# Altium PCB Force_Sensor_Board.PcbDoc
Units mil, origin at the board's own origin, x right, y up, seen from the top; angles counter-clockwise.
Board outline 2900 x 3250 mil, 2 copper layers (Top Layer, Bottom Layer); 66 components, 44 nets, 301 pads, 125 vias.
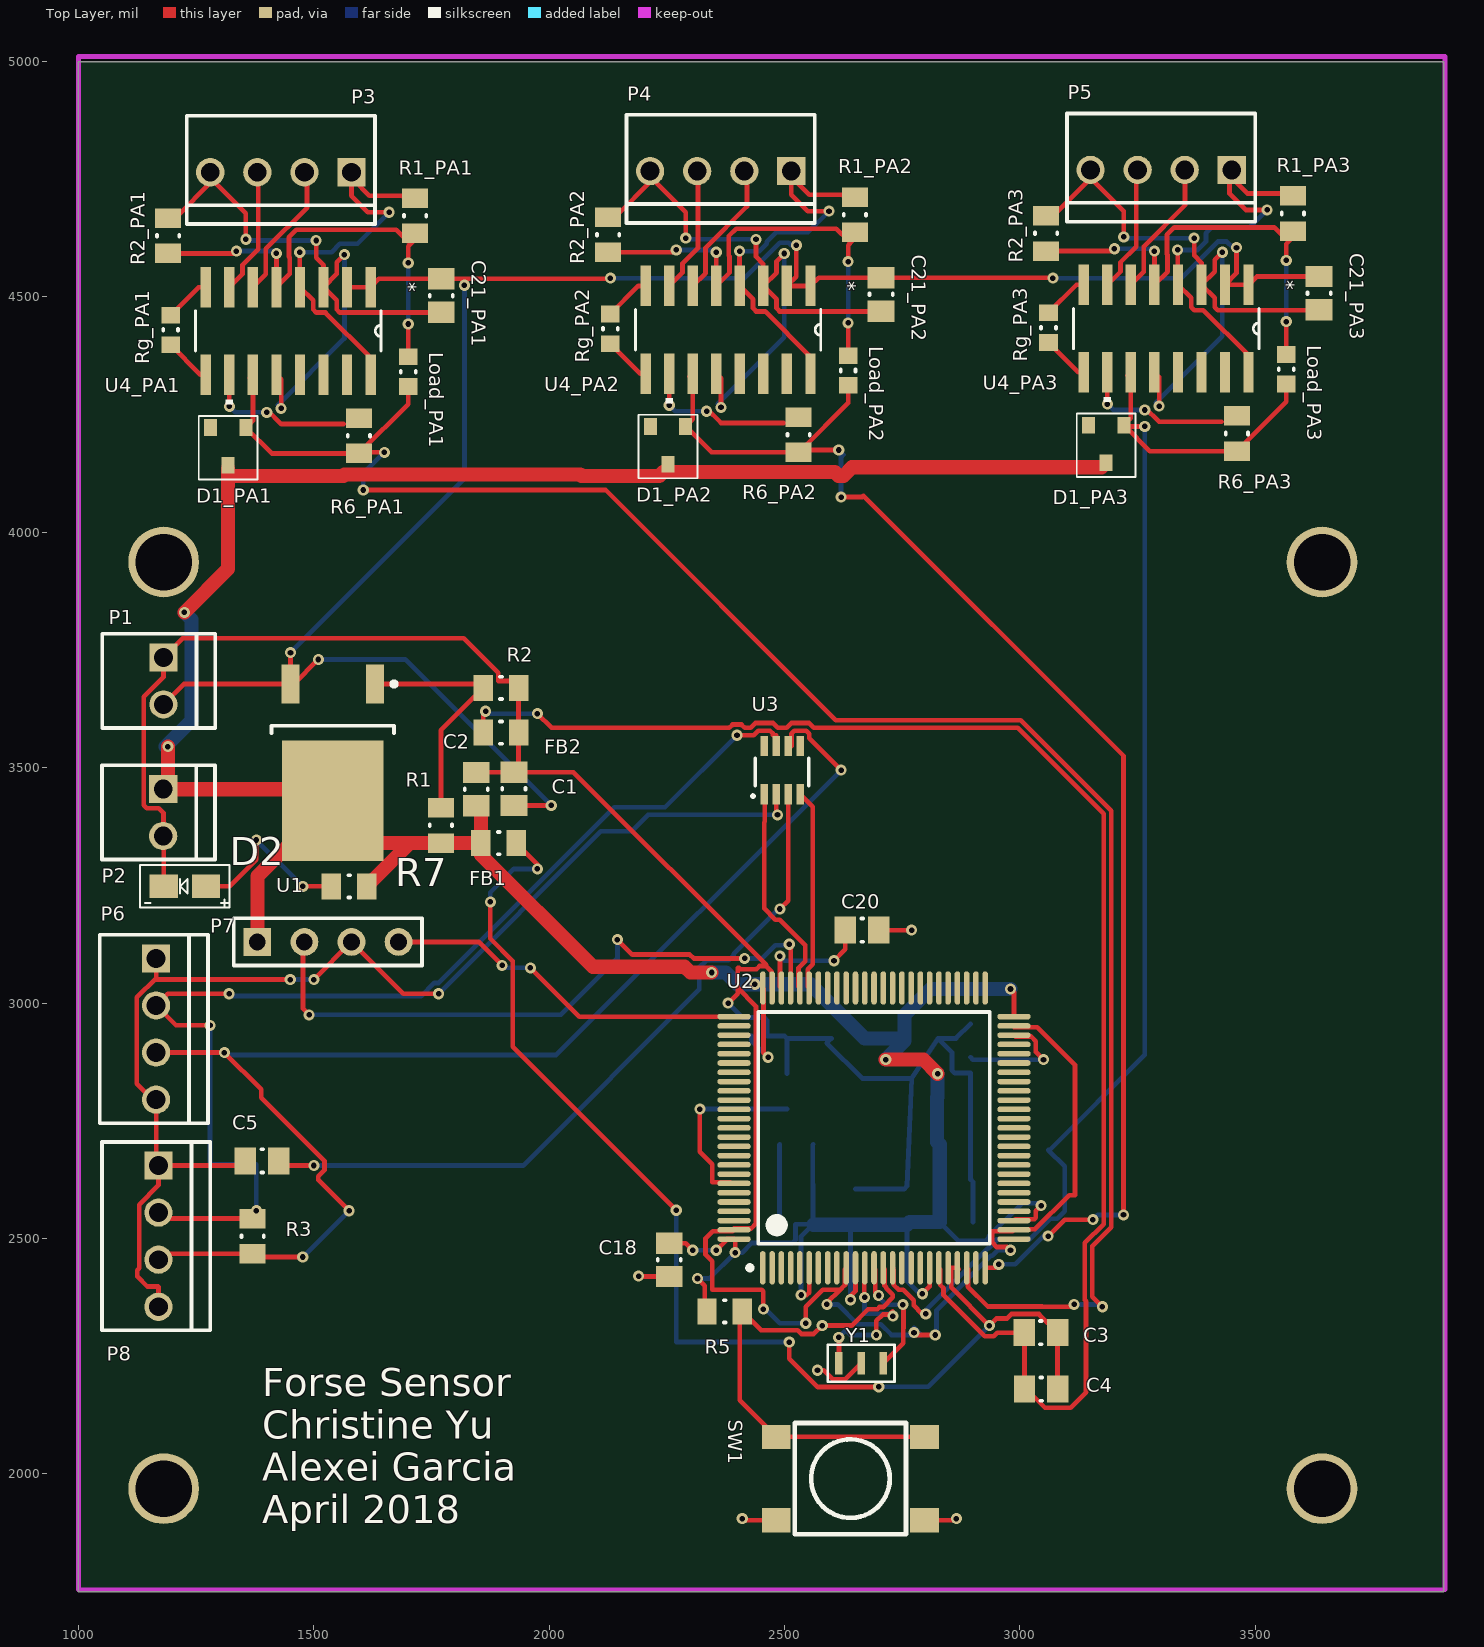
[diagram p0: Top Layer view]
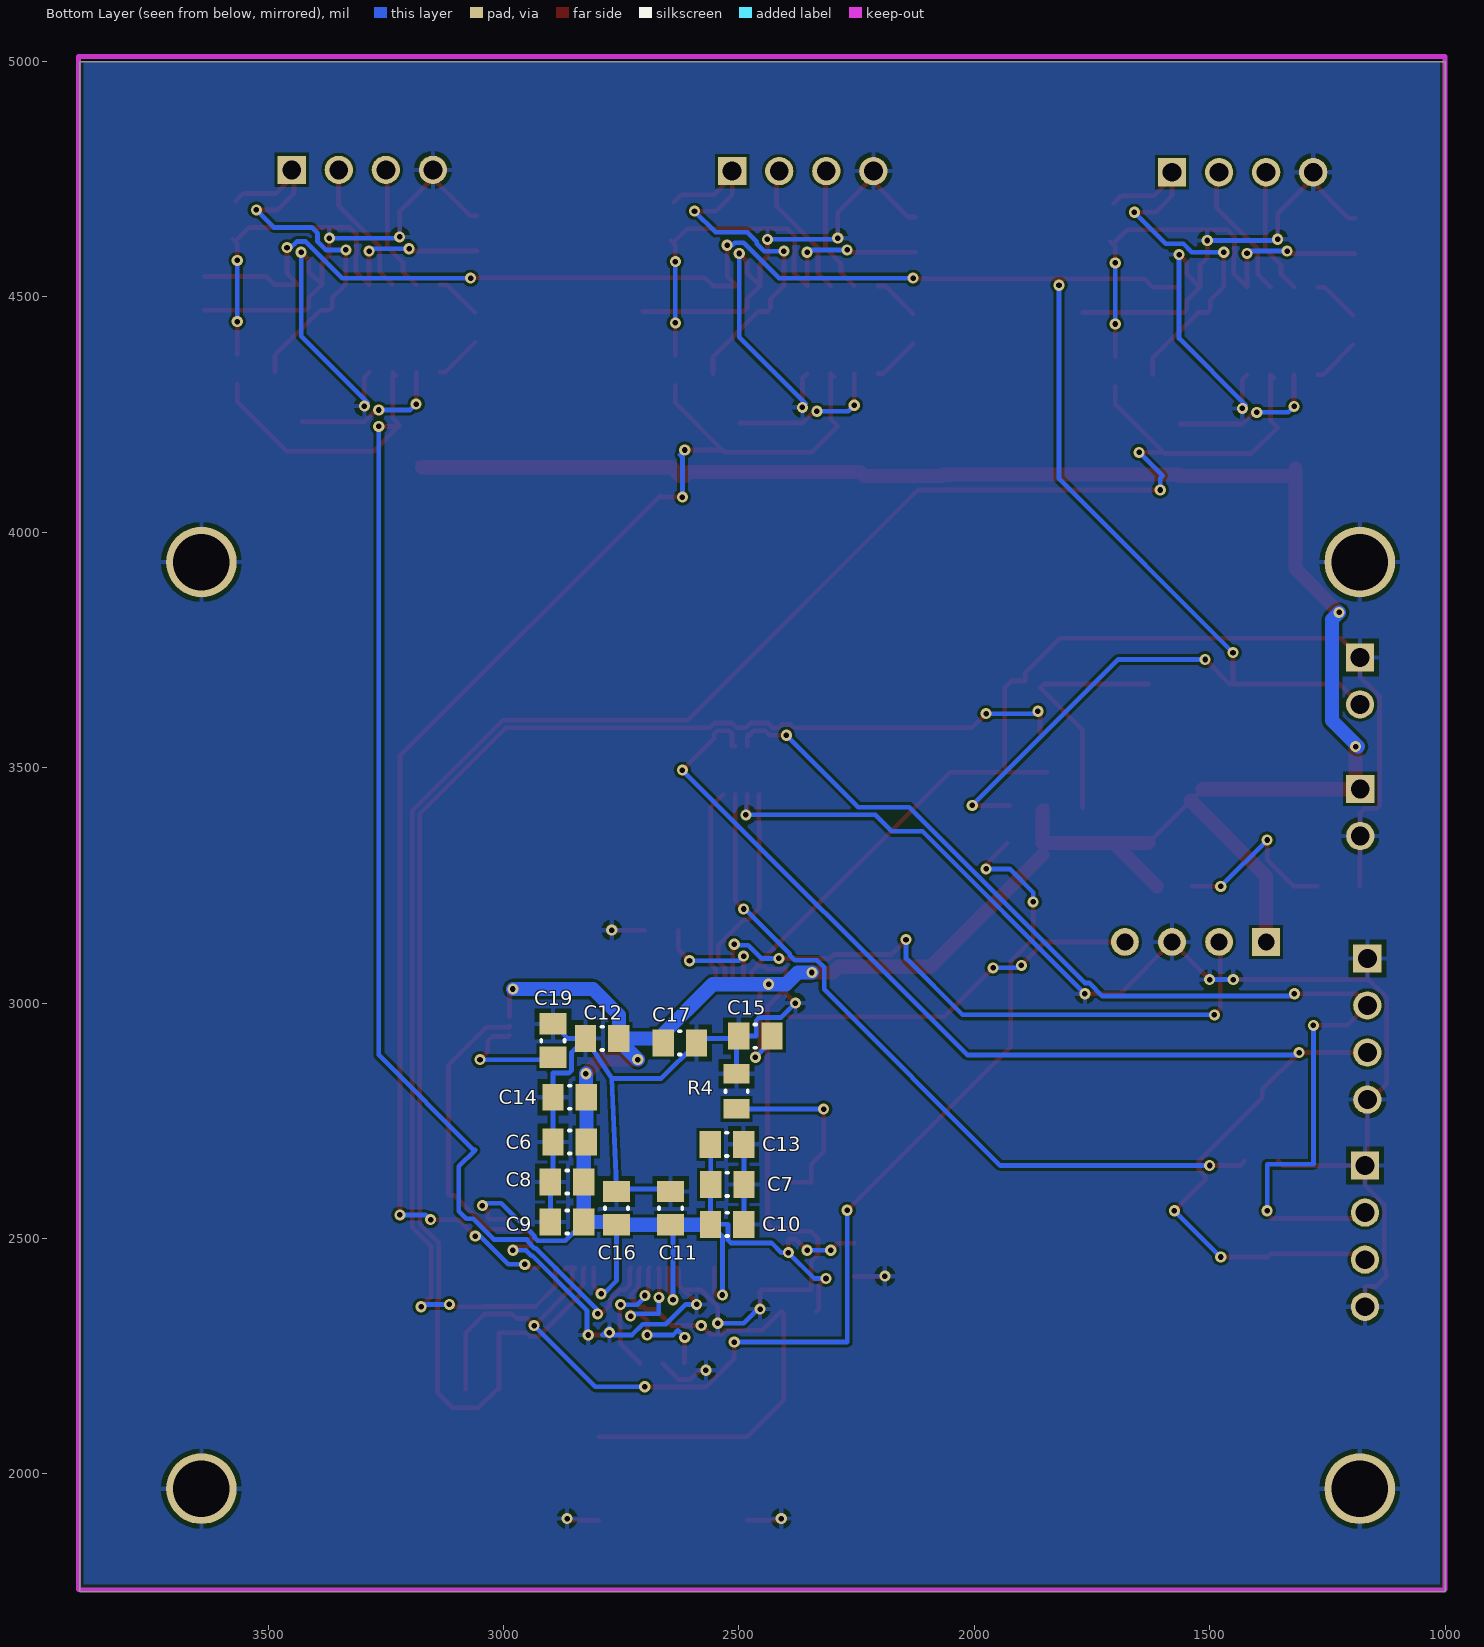
[diagram p1: Bottom Layer view, seen from below]
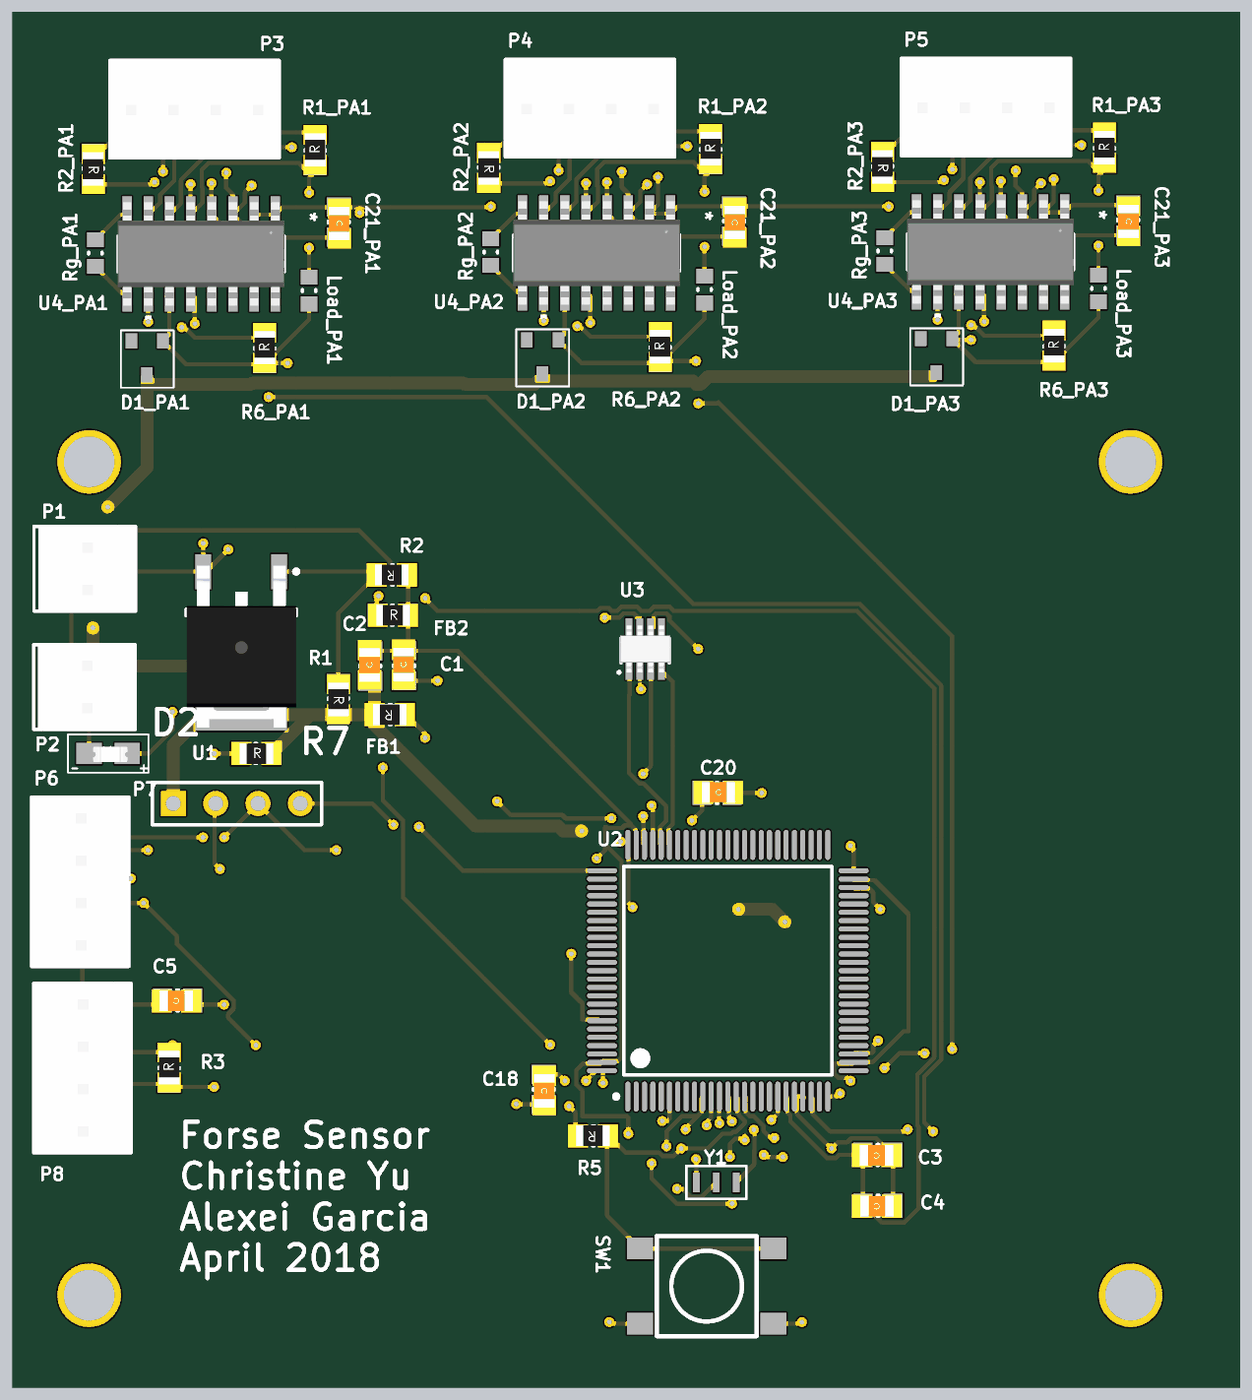
[diagram p2: 3D render of the assembled board from above, using the file's embedded part models]
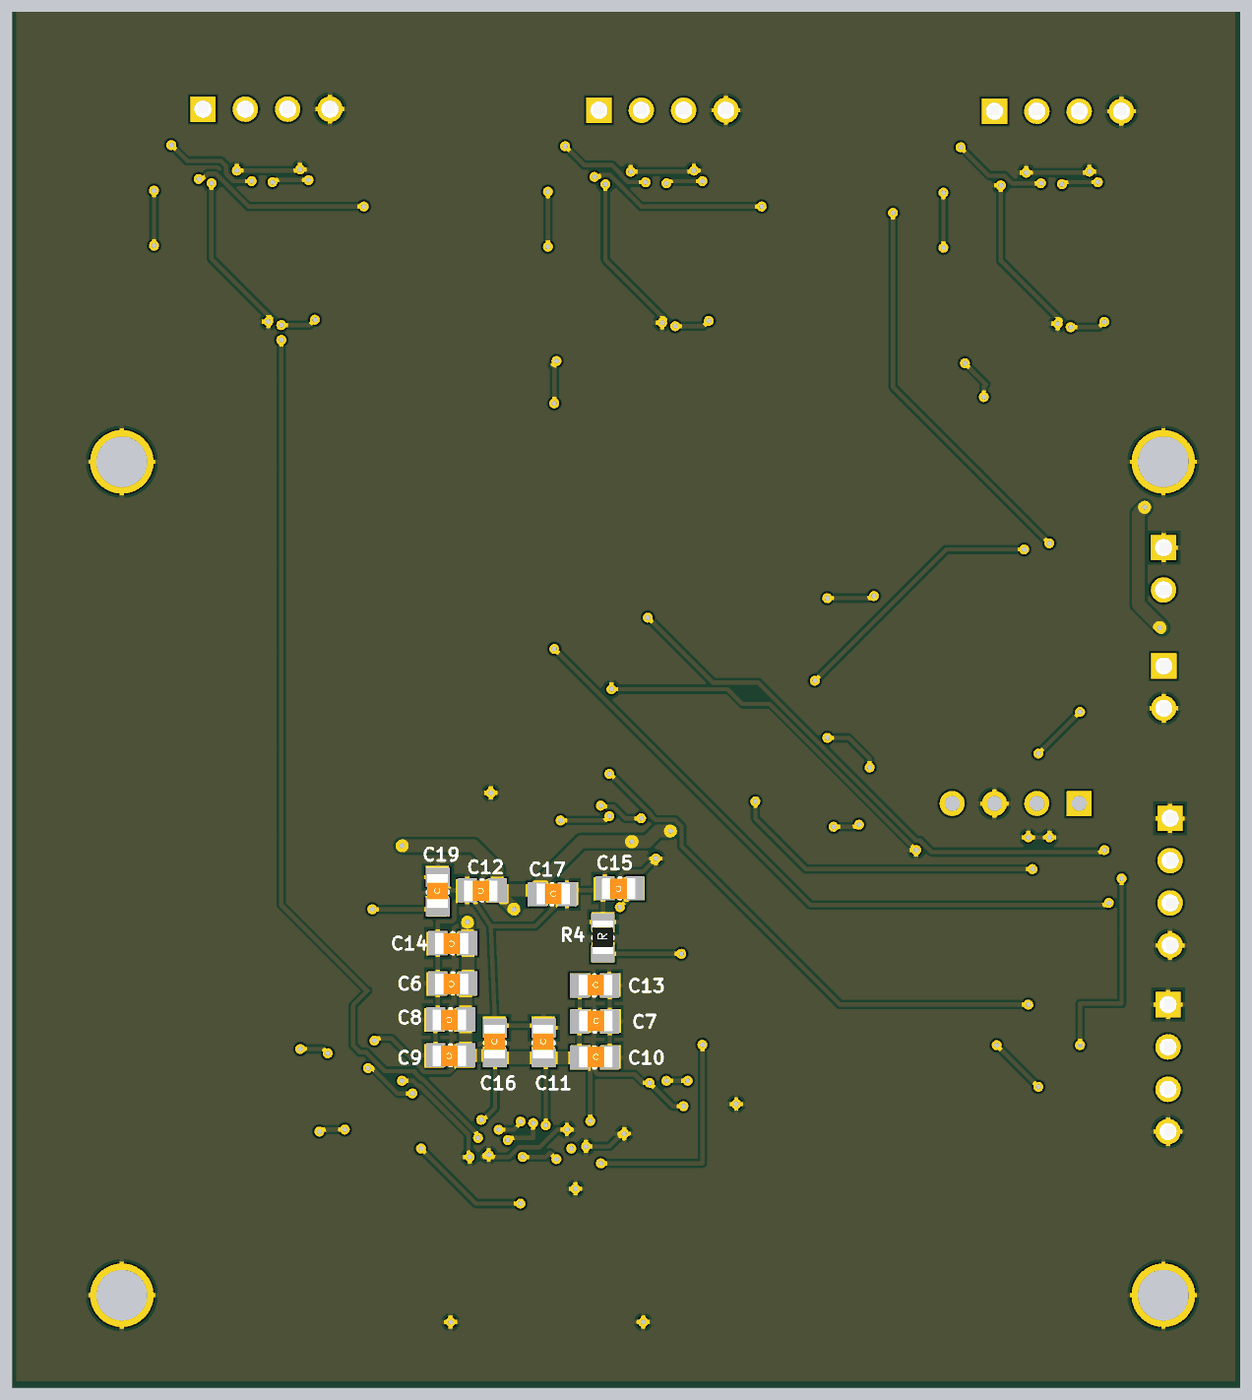
[diagram p3: 3D render of the assembled board from below, using the file's embedded part models]

## Layer stack, top to bottom
Top Solder: solder mask 0.4, Solder Resist, Dk 3.5
Top Layer: signal copper 1.4
Dielectric 1: dielectric 12.6, FR-4, Dk 4.8
Bottom Layer: signal copper 1.4
Bottom Solder: solder mask 0.4, Solder Resist, Dk 3.5

## Board outline
1000,1750 3900,1750 3900,5000 1000,5000

## Design rules (kind name [scope] priority, off if disabled: settings)
Clearance [All] p1: gap=6 ignorepadtopadclearanceinfootprint=FALSE
HoleSize [All] p1: absolutevalues=TRUE maxlimit=250 minlimit=1 maxpercent=80.000 minpercent=20.000
MinimumSolderMaskSliver [All] p1: minsoldermaskwidth=0
PolygonConnect [All] p1: connectstyle=Relief reliefconductorwidth=10 reliefentries=4 polygonreliefangle="90 Angle" airgapwidth=10
RoomDefinition PA3 [InComponentClass('PA3')] p1: confinementstyle=ConfineIn formatcopy=TRUE lockcomponents=FALSE outline 2900,4975 2900,4000 3795,4000 3795,4975
RoomDefinition PA2 [InComponentClass('PA2')] p2: confinementstyle=ConfineIn formatcopy=TRUE lockcomponents=FALSE outline 1969.37,4972.4 1969.37,3997.4 2864.37,3997.4 2864.37,4972.4
RoomDefinition PA1 [InComponentClass('PA1')] p3: confinementstyle=ConfineIn formatcopy=TRUE lockcomponents=FALSE outline 1035,4970 1035,3995 1930,3995 1930,4970
RoomDefinition U_Power [InComponentClass('U_Power')] p4: confinementstyle=ConfineIn formatcopy=TRUE lockcomponents=FALSE outline 1040.2,3200 2120,3200 2120,3869.8 1040.2,3869.8
RoutingVias [All] p1: holewidth=11.81 width=23.62 viastyle="Through Hole" minholewidth=11.81 minwidth=23.62 maxholewidth=11.81 maxwidth=23.62
SilkToSilkClearance [All] p1: silktosilkclearance=0
SilkToSolderMaskClearance [IsPad] p1: minsilkscreentomaskgap=0 clearancetoexposedcopper=TRUE
SolderMaskExpansion [All] p1: expansion=4
Width [All] p1: maxlimit=100 minlimit=6 preferedwidth=10
26 further rules are at their usual default settings.

## Classes and differential pairs
channel class power_amp_module: PA1 PA2 PA3
component class U_Power: C1 C2 D2 FB1 FB2 P1 P2 R1 R2 R7 U1
component class PA3: C21_PA3 D1_PA3 Load_PA3 R1_PA3 R2_PA3 R6_PA3 Rg_PA3 U4_PA3
component class PA2: C21_PA2 D1_PA2 Load_PA2 R1_PA2 R2_PA2 R6_PA2 Rg_PA2 U4_PA2
component class PA1: C21_PA1 D1_PA1 Load_PA1 R1_PA1 R2_PA1 R6_PA1 Rg_PA1 U4_PA1
component class micro_schematic: C3 C4 C5 C6 C7 C8 C9 C10 C11 C12 C13 C14 C15 C16 C17 C18 C19 C20 P3 P4 P5 P6 P7 P8 R3 R4 R5 SW1 U2 U3 Y1

## Components (designator, comment, footprint, x,y, rotation, side; value= is the part's Value field where it differs from the comment)
C1 "0.1uF" C0805 1925,3455.24 r90 top
C2 "1uF" C0805 1845,3454.37 r90 top
C3 "100n" C0805 3044.57,2300 r180 top
C4 "1u" C0805 3045,2180 r180 top
C5 "0.1uF" C0805 1390,2665 r180 top
C6 "100n" C0805 2859.57,2705 r0 bottom
C7 "100n" C0805 2524.57,2615 r180 bottom
C8 "100n" C0805 2865,2620 r0 bottom
C9 "100n" C0805 2865,2535 r0 bottom
C10 "4u7" C0805 2525,2530 r180 bottom
C11 "100n" C0805 2645,2564.57 r90 bottom
C12 "100n" C0805 2790.43,2925 r0 bottom
C13 "100n" C0805 2525.43,2700 r180 bottom
C14 "100n" C0805 2859.57,2800 r0 bottom
C15 "100n" C0805 2465,2930 r0 bottom
C16 "100n" C0805 2760,2564.57 r90 bottom
C17 "100n" C0805 2625.43,2915.43 r180 bottom
C18 "100n" C0805 2255,2454.57 r270 top
C19 "*" C0805 2895,2920.43 r90 bottom
C20 "*" C0805 2664.57,3155 r0 top
C21_PA1 "0.1uF" C0805 1770.63,4503.03 r270 top (schematic designator C21)
C21_PA2 "0.1uF" C0805 2705,4505.43 r270 top (schematic designator C21)
C21_PA3 "0.1uF" C0805 3635.63,4508.03 r270 top (schematic designator C21)
D1_PA1 "BAT54-SOT23" SOT23-DIODE 1355.63,4222.6 r270 top (schematic designator D1)
D1_PA2 "BAT54-SOT23" SOT23-DIODE 2290,4225 r270 top (schematic designator D1)
D1_PA3 "BAT54-SOT23" SOT23-DIODE 3220.63,4227.6 r270 top (schematic designator D1)
D2 "LED" 0805LED 1271.1,3248.03 r180 top
FB1 "FERRITE" R0805 1892.4,3340 r180 top
FB2 "FERRITE" R0805 1897.6,3574.8 r0 top
Load_PA1 "" R0603 1700.63,4341.5 r270 top (schematic designator Load)
Load_PA2 "" R0603 2635,4343.9 r270 top (schematic designator Load)
Load_PA3 "" R0603 3565.63,4346.5 r270 top (schematic designator Load)
P1 "Molex KK 1x2" "Molex KK 2x1" 1180.59,3684.41 r0 top
P2 "Molex KK 1x2" "Molex KK 2x1" 1180,3405 r0 top
P3 "Molex KK 1x4" "Molex KK 4x1" 1380,4765 r270 top
P4 "Molex KK 1x4" "Molex KK 4x1" 2314.37,4767.4 r270 top
P5 "Molex KK 1x4" "Molex KK 4x1" 3250,4770 r270 top
P6 "Molex KK 1x4" "Molex KK 4x1" 1165,2895 r0 top
P7 "Header 4" HDR1X4 1380,3130 r0 top
P8 "Molex KK 1x4" "Molex KK 4x1" 1170,2455 r0 top
R1 "240R" R0805 1770,3377.4 r270 top
R1_PA1 "5.6k" R0805 1715,4672.4 r90 top (schematic designator R1)
R1_PA2 "5.6k" R0805 2649.37,4674.8 r90 top (schematic designator R1)
R1_PA3 "5.6k" R0805 3580,4677.4 r90 top (schematic designator R1)
R2 "390R" R0805 1897.6,3669.8 r180 top
R2_PA1 "1k" R0805 1190.63,4630 r270 top (schematic designator R2)
R2_PA2 "1k" R0805 2125,4632.4 r270 top (schematic designator R2)
R2_PA3 "1k" R0805 3055.63,4635 r270 top (schematic designator R2)
R3 "120R" R0805 1370,2505 r90 top
R4 "100R" R0805 2505,2812.6 r90 bottom
R5 "1k" R0805 2372.6,2345 r180 top
R6_PA1 "10k" R0805 1595.63,4205 r90 top (schematic designator R6)
R6_PA2 "10k" R0805 2530,4207.4 r90 top (schematic designator R6)
R6_PA3 "10k" R0805 3460.63,4210 r90 top (schematic designator R6)
R7 "2k" R0805 1574.8,3248.03 r0 top
Rg_PA1 "1k3" R0603 1195.63,4430 r270 top (schematic designator Rg)
Rg_PA2 "1k3" R0603 2130,4432.4 r270 top (schematic designator Rg)
Rg_PA3 "1k3" R0603 3060.63,4435 r270 top (schematic designator Rg)
SW1 "Push Switch" PUSHBUTTON 2640,1990 r0 top
U1 "LM317" D-PAK 1540.2,3510.51 r270 top
U2 "MC-ARM-STM32F446-LQFP100" STM-LQFP100_N 2690,2735 r90 top
U3 "TCAN332DCNT" SOT-23-8 2495,3495 r0 top
U4_PA1 "INA125_D_16" D16 1445.63,4428 r270 top value=Value (schematic designator U4)
U4_PA2 "INA125_D_16" D16 2380,4430.4 r270 top value=Value (schematic designator U4)
U4_PA3 "INA125_D_16" D16 3310.63,4433 r270 top value=Value (schematic designator U4)
Y1 "CSTCE8M00" "8MHz Ceramic Resonator" 2710,2235 r180 top

## Footprints (in the part's own frame and the unit in brackets; to place one, negate y for a bottom-side part, rotate by r counter-clockwise, add the part's x,y. Pads: shape width x height; smd on the part's side, far side on the other; paste and mask are expansions set on the pad)
"8MHz Ceramic Resonator" [mm] "8MHz Ceramic Resonator Murata"
  rect 0.4x1.2 smd: 1(0,0) 2(1.2,0) 3(2.4,0)
  silkscreen extent -0.6,-1 3,1
0805LED [mil]
  rect 60x50 smd: A(0,0) K(90,0)
  silkscreen extent -50,-45 140,45, body extent -1,-16 81,20, height 33
C0805 [mm] "Chip Capacitor, Body 2.0x1.2mm, Height 0.75mm, IPC Medium Density"
  rect 1.15x1.45 smd: 1(-0.9,0) 2(0.9,0)
  silkscreen extent -0.05,-0.62 0.05,0.63, body extent -1.42,-0.67 1.58,0.73, height 0.93
D16 [mil]
  rect 86x22 smd: 1(-93,175) 2(-93,125) 3(-93,75) 4(-93,25) 5(-93,-25) 6(-93,-75) 7(-93,-125) 8(-93,-175) 9(93,-175) 10(93,-125) 11(93,-75) 12(93,-25) 13(93,25) 14(93,75) 15(93,125) 16(93,175)
  silkscreen extent -43,-197 156,197, body extent -122,-197 122,197, height 69
D-PAK [mm] "D-PAK, 4-Leads, Body 6.1x6.5mm, Pitch 2.28mm, Lead Span 9.7mm, IPC Medium Density"
  rect 2.1x0.95 smd: 1(-4.25,2.28) 3(-4.25,-2.28)
  rect 6.5x5.5 smd: 4(2.05,0)
  silkscreen extent -4.37,-3.3 -1.6,3.43, body extent -4.6,-3.28 5.1,3.3, height 2.3
HDR1X4 [mm] "Connector; Header; 4 Position"
  rect 1.5x1.5 hole 0.9: 1(0,0)
  round 1.5 hole 0.9: 2(2.54,0) 3(5.08,0) 4(7.62,0)
  silkscreen extent -1.27,-1.27 8.89,1.27
"Molex KK 2x1" [mil]
  rect 60x60 hole 40: 1(0,50)
  round 60 hole 40: 2(0,-50)
  silkscreen extent -130,-100 110,100, body extent -120,-100 110,100, height 458
"Molex KK 4x1" [mil]
  rect 60x60 hole 40: 1(0,200)
  round 60 hole 40: 2(0,100) 3(0,0) 4(0,-100)
  silkscreen extent -120,-150 110,250, body extent -120,-150 110,250, height 458
PUSHBUTTON [mm]
  rect 1.55x1.3 smd: 1(-4,2.25) 1(4,2.25) 2(-4,-2.25) 2(4,-2.25)
  silkscreen extent -3,-3 3,3
R0603 [mm] "Chip Resistor, Body 1.6x0.8mm, IPC Medium Density"
  rect 0.9x1 smd: 1(-0.8,0) 2(0.8,0)
  silkscreen extent -0.05,-0.4 0.05,0.4, body extent -0.85,-0.47 0.85,0.47, height 0.6
R0805 [mm] "Chip Resistor, Body 2.0x1.3mm, IPC Medium Density"
  rect 1.05x1.4 smd: 1(-0.95,0) 2(0.95,0)
  silkscreen extent -0.05,-0.6 0.05,0.6, body extent -1.46,-0.7 1.54,0.7, height 0.53
SOT23-DIODE [mm] "SOT23 WITH A/K PIN NUMBERS"
  rect 0.9x0.7 smd: A(0,0) K(2.032,-0.965) NC(0,-1.9)
  silkscreen extent -0.63,-2.54 2.8,0.64, body extent -0.1,-2.41 2.34,0.51, height 1.33
SOT-23-8 [mm] "SOT-23-8"
  rect 0.4x1.1 smd: 1(-0.975,-1.3) 2(-0.325,-1.3) 3(0.325,-1.3) 4(0.975,-1.3) 5(0.975,1.3) 6(0.325,1.3) 7(-0.325,1.3) 8(-0.975,1.3)
  silkscreen extent -1.65,-1.48 1.44,0.65, body extent -1.5,-1.4 1.5,1.4, height 1.11
STM-LQFP100_N [mm] "Thin QFP, 100-Leads, Body 14x14mm, Pitch 0.5mm, IPC Medium Density"
  oval 1.8x0.3 smd: 1(-7.55,6) 2(-7.55,5.5) 3(-7.55,5) 4(-7.55,4.5) 5(-7.55,4) 6(-7.55,3.5) 7(-7.55,3) 8(-7.55,2.5) 9(-7.55,2) 10(-7.55,1.5) 11(-7.55,1) 12(-7.55,0.5) 13(-7.55,0) 14(-7.55,-0.5) 15(-7.55,-1) 16(-7.55,-1.5) 17(-7.55,-2) 18(-7.55,-2.5) 19(-7.55,-3) 20(-7.55,-3.5) 21(-7.55,-4) 22(-7.55,-4.5) 23(-7.55,-5) 24(-7.55,-5.5) 25(-7.55,-6) 51(7.55,-6) 52(7.55,-5.5) 53(7.55,-5) 54(7.55,-4.5) 55(7.55,-4) 56(7.55,-3.5) 57(7.55,-3) 58(7.55,-2.5) 59(7.55,-2) 60(7.55,-1.5) 61(7.55,-1) 62(7.55,-0.5) 63(7.55,0) 64(7.55,0.5) 65(7.55,1) 66(7.55,1.5) 67(7.55,2) 68(7.55,2.5) 69(7.55,3) 70(7.55,3.5) 71(7.55,4) 72(7.55,4.5) 73(7.55,5) 74(7.55,5.5) 75(7.55,6)
  oval 0.3x1.8 smd: 26(-6,-7.55) 27(-5.5,-7.55) 28(-5,-7.55) 29(-4.5,-7.55) 30(-4,-7.55) 31(-3.5,-7.55) 32(-3,-7.55) 33(-2.5,-7.55) 34(-2,-7.55) 35(-1.5,-7.55) 36(-1,-7.55) 37(-0.5,-7.55) 38(0,-7.55) 39(0.5,-7.55) 40(1,-7.55) 41(1.5,-7.55) 42(2,-7.55) 43(2.5,-7.55) 44(3,-7.55) 45(3.5,-7.55) 46(4,-7.55) 47(4.5,-7.55) 48(5,-7.55) 49(5.5,-7.55) 50(6,-7.55) 76(6,7.55) 77(5.5,7.55) 78(5,7.55) 79(4.5,7.55) 80(4,7.55) 81(3.5,7.55) 82(3,7.55) 83(2.5,7.55) 84(2,7.55) 85(1.5,7.55) 86(1,7.55) 87(0.5,7.55) 88(0,7.55) 89(-0.5,7.55) 90(-1,7.55) 91(-1.5,7.55) 92(-2,7.55) 93(-2.5,7.55) 94(-3,7.55) 95(-3.5,7.55) 96(-4,7.55) 97(-4.5,7.55) 98(-5,7.55) 99(-5.5,7.55) 100(-6,7.55)
  silkscreen extent -7.67,-6.25 6.25,6.82, body extent -7,-7 7,7, height 1.6

## Part data
C1 C2 C3 C4 C5 C6 C7 C8 C9 C10 C11 C12 C13 C14 C15 C16 C17 C18 C19 C20 C21_PA1 C21_PA2 C21_PA3: library part C0805, "0805 Capacitor"
D1_PA1 D1_PA2 D1_PA3: "SINGLE SHOTTKY DIODE", Capacitance @ Vr, F="10pF @ 1V, 1MHz", Current - Average Rectified (Io)="200mA (DC)", Current - Reverse Leakage @ Vr="2µA @ 25V", Manufacturer="NXP Semiconductors", Manufacturer Part Number=BAT54,215, Package / Case="SOT-23-3, TO-236-3, Micro3™, SSD3, SST3", Supplier Part Number=568-1610-1-ND, Voltage - DC Reverse (Vr) (Max)=30V, Voltage - Forward (Vf) (Max) @ If="800mV @ 100mA", Category="Discrete Semiconductor Products", Diode Type=Schottky, Mounting Type="Surface Mount", Packaging="Cut Tape (CT)", Reverse Recovery Time (trr)=5ns, RoHS="RoHS Compliant", Speed="Small Signal =< 200mA (Io), Any Speed", Supplier=Digi-Key, Supplier 1=Digi-Key, Supplier Part Number 1=568-1610-1-ND
D2: Manufacturer="OSRAM Opto Semiconductors Inc", Manufacturer Part Number="LS T676-Q1R2-1-Z", Reel=D13
FB1 FB2: "FERRITE BEAD 0805"
Load_PA1 Load_PA2 Load_PA3 Rg_PA1 Rg_PA2 Rg_PA3: library part R0603, "RESISTOR 0603"
P1 P2: "1x2 Molex KK Connector"
P3 P4 P5 P6 P8: "1x4 Molex KK Connector"
P7: "Header, 4-Pin", LatestRevisionDate=17-Jul-2002, LatestRevisionNote="Re-released for DXP Platform.", Publisher="Altium Limited"
R1 R1_PA1 R1_PA2 R1_PA3 R2 R2_PA1 R2_PA2 R2_PA3 R3 R4 R5 R6_PA1 R6_PA2 R6_PA3 R7: library part R0805, "RESISTOR 0805"
SW1: library part PUSHBUTTON
U1: "Linear Voltage Regulator"
U3: "IC TXRX CAN 3.3V SOT23-8"
U4_PA1 U4_PA2 U4_PA3: "Imported", Manufacturer="Texas Instruments", Manufacturer_Part_Number=ina125_d_16, PACKAGE_DESIGNATOR=D, Datasheet_URL=http://www.ti.com/lit/gpn/INA125, FAMILY_NAME="SINGLE SUPPLY", GENERIC_PART_NUMBER=INA125, INDUSTRY_STD_PKG_TYPE=SOIC, PIN_COUNT=16, RefDes=RefDes, Type=Type, Vendor="Texas Instruments"
Y1: "8MHz Ceramic Resonator"

## Free pads (board coordinates)
  round 150 hole 120: 2(3641.73,1968.5) 3(1181.1,1968.5) 4(3641.73,3937.01) 5(1181.1,3937.01)

## Via types
v1: diameter 23.62, hole 11.81, Top Layer to Bottom Layer, 125 vias

## Nets (pads, with @x,y where several pads share a name; then routed paths per layer and width w, separated by ;. In a path a pad name is that pad's centre, name@x,y a point inside that pad or via, vN(x,y) a via of type N, cw(c..) or ccw(c..) an arc to the next point about the centre after c; other vN are vias at no path point)
"3V3 DVDD": C5.1 U3.3 | length 1574.4
  Top Layer w10: C5.1 1435.43,2655 v1(1500,2655) ; v1(2490,3200) 2507.81,3217.81 U3.3
  Bottom Layer w10: v1(1500,2655) 1945,2655 2319,3029 2319,3075.77 2334.23,3091 2381,3091 2392.19,3102.19 2392.19,3104.45 2487.74,3200 v1(2490,3200)
3V3_AVDD: C3.1 C4.1 FB1.1 U2.21 U2.22 | length 2566.6
  Top Layer w10: v1(1875,3215) 1875,3137.26 1922.81,3089.45 1922.81,2907.19 v1(2270,2560) ; FB1.1 1975,3294.8 v1(1975,3285) ; v1(2510,2280) 2510,2245 2570.62,2184.38 2699.38,2184.38 v1(2700,2185) ; U2.22@2869.94,2434.98 U2.22 U2.21 2853.81,2431.43 2853.81,2396.19 v1(2935,2315) 2950,2330 2972.4,2330 2981.94,2339.54 3040.46,2339.54 C3.1 3080,2180.43 C4.1
  Bottom Layer w10: v1(1875,3215) 1875,3235 1925,3285 v1(1975,3285) ; v1(2270,2560) 2270,2280 v1(2510,2280) ; v1(2700,2185) 2805,2185 v1(2935,2315)
AGND: C3.2 C4.2 FB2.1 U2.20 | length 3273
  Top Layer w10: FB2.1 1860.2,3615.2 v1(1865,3620) ; v1(1975,3615) 2005,3585 2382.74,3585 2389.55,3591.81 2408.45,3591.81 2415.26,3585 2427.72,3585 2437.56,3594.83 2475.67,3594.83 2485.51,3585 2504.49,3585 2514.33,3594.83 2552.44,3594.83 2562.28,3585 2995,3585 3177.81,3402.19 3177.81,2530.55 3137.81,2490.55 3137.81,2369.56 3140.44,2366.93 3140.44,2173.27 3107.63,2140.46 3053.24,2140.46 3013.7,2180 C4.2 3009.57,2299.57 C3.2 2952.26,2300 2944.45,2292.19 2924.98,2292.19 2837.81,2379.36 2837.81,2393.99 2830.57,2401.23 2830.57,2434.98 U2.20
  Bottom Layer w10: v1(1865,3620) 1870,3615 v1(1975,3615)
CANH: P6.2 P8.2 R3.2 U3.7 | length 2430.1
  Top Layer w10: P8.2@1174.06,2559.06 P8.2 1182.6,2542.4 R3.2 ; v1(1279.53,2952.76) 1207.24,2952.76 P6.2 1190,3020 v1(1320,3020) ; v1(2399,3569) 2434.35,3569 2444.18,3578.83 2469.04,3578.83 2475.49,3572.39 2475.49,3569 2482.2,3569 U3.7
  Bottom Layer w10: v1(1279.53,2952.76) 1279.53,2657.48 1377.95,2657.48 v1(1377.95,2559.06) ; v1(1320,3020) 1320,3015 1727.74,3015 1755.55,3042.81 1765.18,3042.81 2138.37,3416 2246,3416 v1(2399,3569)
CANL: P6.3 P8.3 R3.1 U3.6 | length 2799.5
  Top Layer w10: P6.3 v1(1310,2895) 1388.2,2816.8 1388.2,2799.05 1522.81,2664.45 1522.81,2645.55 1509.45,2632.19 1509.45,2624.41 v1(1574.8,2559.06) ; P8.3 1182.6,2467.6 R3.1 1376.97,2460.63 v1(1476.38,2460.63) ; U3.6 2514.51,3546.18 2514.51,3572.39 2520.96,3578.83 2545.82,3578.83 2552.26,3572.39 2552.26,3562.74 v1(2620,3495)
  Bottom Layer w10: v1(1310,2895) 1315,2890 2015,2890 v1(2620,3495) ; v1(1476.38,2460.63) v1(1574.8,2559.06)
CANRX: U2.70 U3.4 | length 428.1
  Top Layer w10: U3.4 2560,3417.2 2560,3082.29 2549.43,3071.72 2549.43,3035.02 U2.70
CANTX: U2.71 U3.1 | length 461.4
  Top Layer w10: U3.1 2457.81,3442.62 2457.81,3385.55 2456.61,3384.35 2456.61,3201.13 2480.55,3177.19 2490.07,3177.19 2544,3123.26 2544,3088.92 2529.74,3074.66 2529.74,3035.02 U2.71
DGND: C1.2 C2.2 C5.2 C6.2 C7.2 C8.2 C9.2 C10.2 C11.2 C12.2 C13.2 C14.2 C15.2 C16.2 C17.2 C18.2 C19.2 C20.2 C21_PA1.2 C21_PA2.2 C21_PA3.2 D2.K FB2.2 P1.1 P2.2 P3.4 P4.4 P5.4 P6.1 P6.4 P7.3 P8.1 P8.4 pad.2 pad.3 pad.4 pad.5 R2.1 R2_PA1.1 R2_PA2.1 R2_PA3.1 R4.2 SW1.2 U2.10 U2.27 U2.49 U2.74 U2.99 U3.2 U4_PA1.3 U4_PA1.12 U4_PA2.3 U4_PA2.12 U4_PA3.3 U4_PA3.12 Y1.2 | length 13900.4
  Top Layer w10: P6.1 1165,3052.98 ; P8.4 1170,2397.02 1169.02,2398 1146.39,2398 1125.01,2419.38 1125.01,2432.64 1129,2436.63 1129,2571.98 1170,2612.98 P8.1 ; D2.K 1181.1,3353.9 P2.2 1180.59,3355.59 1180.59,3403.91 1170.5,3414 1145.44,3414 1139,3420.44 1139,3650.8 1180.59,3692.39 P1.1 1221.18,3775 1818.78,3775 1891.87,3701.92 1891.87,3684.41 1920.39,3684.41 R2.1 FB2.2 1935,3500.67 C1.2 ; R2_PA1.1 1205.43,4667.4 1285.63,4747.6 1355.63,4677.6 v1(1355.63,4622.6) ; C5.2 1344.57,2655 P8.1 ; U4_PA1.12 1430.63,4325 v1(1430.63,4263.22) ; v1(1450,3050) 1165,3050 1165,3052.98 ; v1@1500,3055 v1(1500,3050) P7.3 1690,3020 v1(1765,3020) ; v1(1505,4620) 1505,4583.23 1520.63,4567.6 U4_PA1.3 ; v1(1565,4590) 1548.63,4573.63 1548.63,4549 U4_PA1.3 ; C21_PA1.2 1770.03,4467 1555.07,4467 1548.63,4473.44 1548.63,4493 U4_PA1.3 ; C2.2 1845.87,3490.67 C1.2 ; R2_PA2.1 2139.8,4669.8 2220,4750 2290,4680 v1(2290,4625) ; v1(2190,2420) 2190.87,2419.13 C18.2 ; U4_PA2.12 2365,4327.4 v1(2365,4265.62) ; v1(2380,3000) 2400.34,3020.34 2400.34,3032.24 ; v1(2410,1905) 2413.58,1901.42 SW1.2@2482.52,1901.42 ; v1(2439.37,4622.4) 2439.37,4585.63 2455,4570 U4_PA2.3 ; v1(2455,2350) 2455,2387.65 2451.32,2391.32 2346.32,2391.32 2346.32,2451.42 2332.19,2465.55 2332.19,2500.6 2347.28,2515.68 2389.98,2515.68 U2.99 2392.76,2521.24 2429.29,2521.24 2439.19,2531.15 2439.19,2993.4 2400.34,3032.24 ; U2.74 2472.56,3033.15 2472.56,3066.9 2460.78,3078.68 ; U3.2 2482.2,3402.8 v1(2485,3400) ; v1(2499.37,4592.4) 2483,4576.03 2483,4551.4 U4_PA2.3 ; v1(2545,2320) 2545,2355 2581.32,2391.32 2618.26,2391.32 ; v1(2570,2220) 2583.46,2220 2603.08,2200.38 2627.94,2200.38 2662.56,2235 Y1.2 ; v1(2590,2360) 2590,2363.06 2618.26,2391.32 ; U2.10 2628.17,2434.98 2628.17,2401.23 2618.26,2391.32 ; C20.2 v1(2770,3155) ; C21_PA2.2 2704.4,4469.4 2489.44,4469.4 2483,4475.85 2483,4495.4 U4_PA2.3 ; v1(2775,2300) 2780,2295 v1(2820,2295) ; SW1.2@2797.48,1901.42 2861.42,1901.42 v1(2865,1905) ; v1(2980,2475) 2973.13,2481.87 2950.71,2481.87 2940.81,2491.78 2940.81,2515.68 2984.46,2515.68 U2.27 2988.15,2519.37 3031.8,2519.37 3104.43,2592 3117,2592 3117,2868.38 3036.62,2948.76 2987.24,2948.76 U2.49 ; R2_PA3.1 3070.43,4672.4 3150.63,4752.6 3220.63,4682.6 v1(3220.63,4627.6) ; U4_PA3.12 3295.63,4330 v1(3295.63,4268.22) ; v1(3370,4625) 3370,4588.23 3385.63,4572.6 U4_PA3.3 ; v1(3430,4595) 3413.63,4578.63 3413.63,4554 U4_PA3.3 ; C21_PA3.2 3635.03,4472 3420.07,4472 3413.63,4478.44 3413.63,4498 U4_PA3.3 ; 1165,3052.98 1124,3011.98 1124,2829 1158,2795 P6.4 1165,2660 P8.1 ; C1.2 2051.59,3490.67 2460.78,3081.48 2460.78,3078.68 ; 2400.34,3032.24 2400.34,3074.66 2403.08,3074.66 2405.55,3072.19 2440.29,3072.19 2446.78,3078.68 2460.78,3078.68
  Bottom Layer w10: v1(1355.63,4622.6) 1358.23,4620 v1(1505,4620) ; v1(1430.63,4263.22) 1423.44,4270.41 1565,4411.97 v1(1565,4590) ; v1(1450,3050) v1(1500,3050) ; v1(1765,3020) 2110,3365 2175,3365 2210,3400 v1(2485,3400) ; v1(2290,4625) 2292.6,4622.4 v1(2439.37,4622.4) ; v1(2365,4265.62) 2357.81,4272.81 2499.37,4414.37 v1(2499.37,4592.4) ; v1(2380,3000) 2410.46,2969.54 2456.76,2969.54 2463.2,2963.1 2463.2,2930 C15.2 C15.2@2505,2925.43 ; v1(2455,2350) 2455,2355 2490,2320 v1(2545,2320) ; C10.2 2489.13,2530.43 C7.2 2489.13,2699.13 C13.2 ; R4.2 C15.2@2505,2925.43 ; v1(2590,2360) 2612.74,2360 2654.93,2317.81 2704.45,2317.81 2727.26,2295 2790,2295 2775,2310 v1(2775,2300) ; C11.2@2650,2605 2754.13,2605 2760,2610.87 2770,2840 ; v1(2820,2295) 2822.81,2297.81 2822.81,2347.81 2938.46,2463.46 2940.88,2463.46 2952.43,2475 v1(2980,2475) ; C19.2 2864.13,2925 C12.2 ; C9.2 C8.2 2895,2625.43 C6.2 C14.2 2895,2851.36 2861.9,2851.36 2855.46,2857.81 2855.46,2895.41 C12.2 ; v1(3220.63,4627.6) 3223.23,4625 v1(3370,4625) ; v1(3295.63,4268.22) 3288.44,4275.41 3430,4416.97 v1(3430,4595) ; C15.2@2505,2925.43 2505.43,2925 2599.57,2925 C17.2 2590,2915 2665,2840 2770,2840 ; 2770,2840 C12.2
NetC19_1: C19.1 U2.48 | length 254.7
  Top Layer w10: U2.48 2990.02,2929.07 3023.77,2929.07 3033.68,2919.17 3033.68,2896.32 v1(3050,2880)
  Bottom Layer w10: C19.1 2900,2880 v1(3050,2880)
NetC20_1: C20.1 U2.73 | length 263.2
  Top Layer w10: v1(2490,3100) 2490.37,3099.63 2490.37,3035.02 U2.73 ; v1(2605,3090) 2629.13,3114.13 C20.1
  Bottom Layer w10: v1(2490,3100) 2500,3090 v1(2605,3090)
NetD1_PA1_A: D1_PA1.A Load_PA1.2 R6_PA1.1 U2.23 U4_PA1.11 | length 4030.3
  Top Layer w10: U4_PA1.11@1363.63,4328 U4_PA1.11 1370.63,4237.6 D1_PA1.A 1410.63,4167.6 R6_PA1.1 R6_PA1.1@1598.03,4170 ; v1(1605,4090) 2120,4090 2609,3601 3001.63,3601 3193.81,3408.82 3193.81,2523.92 3153.81,2483.92 3153.81,2376.19 v1(3175,2355) ; v1(1650,4170) R6_PA1.1@1598.03,4170 ; Load_PA1.2 1700.63,4272.6 R6_PA1.1@1598.03,4170 ; U2.23 2889.63,2434.98 2889.63,2398 2932.08,2355.54 3047.08,2355.54 3047.63,2355 3110,2355 v1(3115,2360)
  Bottom Layer w10: v1(1605,4090) 1605,4115 1600,4120 v1(1650,4170) ; v1(3115,2360) 3170,2360 v1(3175,2355)
NetD1_PA2_A: D1_PA2.A Load_PA2.2 R6_PA2.1 U2.25 U4_PA2.11 | length 2911.9
  Top Layer w10: U4_PA2.11@2298,4330.4 U4_PA2.11 2305,4240 D1_PA2.A 2345,4170 R6_PA2.1 R6_PA2.1@2535,4175 ; v1(2615,4175) R6_PA2.1@2535,4175 ; v1(2620,4075) 2665,4075 2667.5,4077.5 3220,3525 v1(3220,2550) ; Load_PA2.2 2635,4275 R6_PA2.1@2535,4175 ; U2.25 2947.76,2437.76 v1(2955,2445) ; v1(3060,2505) 3095,2540 v1(3155,2540)
  Bottom Layer w10: v1(2615,4175) 2625,4165 2620,4160 v1(2620,4075) ; v1(2955,2445) 2990,2445 3054,2509 3058,2505 v1(3060,2505) ; v1(3155,2540) 3165,2550 v1(3220,2550)
NetD1_PA3_A: D1_PA3.A Load_PA3.2 R6_PA3.1 U2.15 U4_PA3.11 | length 2915
  Top Layer w10: U2.15 2732.15,2434.98 2732.15,2401.23 2742.05,2391.32 2751.68,2391.32 2774.11,2368.9 2774.11,2357.76 2791.88,2340 v1(2800,2340) ; U4_PA3.11@3228.63,4333 U4_PA3.11 3235.63,4242.6 D1_PA3.A D1_PA3.A@3223.23,4225 ; v1(3265,4225) D1_PA3.A@3223.23,4225 ; Load_PA3.2 3565.63,4277.6 R6_PA3.1 3275.63,4172.6 D1_PA3.A@3223.23,4225
  Bottom Layer w10: v1(2800,2340) 2800,2347.63 2931.83,2479.46 2934.25,2479.46 2950.07,2495.27 2950.07,2497.7 2950.18,2497.81 3020.07,2497.81 3064.45,2542.19 3079.45,2542.19 3095,2557.74 3095,2653.36 3060.55,2687.81 3062.81,2687.81 3265,2890 v1(3265,4225)
NetD2_A: D2.A R7.1 | length 372.5
  Top Layer w10: D2.A 1321.66,3248.03 1377.95,3304.33 v1(1377.95,3346.46) ; v1(1476.38,3248.03) R7.1
  Bottom Layer w10: v1(1377.95,3346.46) v1(1476.38,3248.03)
NetLoad_PA1_1: Load_PA1.1 R1_PA1.1 R2_PA1.2 U4_PA1.5 | length 953.2
  Top Layer w10: R2_PA1.2 1340.63,4592.6 v1(1335.63,4597.6) ; v1(1420.63,4592.6) U4_PA1.5 1448.63,4549 1448.63,4584.11 1447.19,4585.55 1447.19,4627.19 1462.81,4642.81 1675.42,4642.81 R1_PA1.1@1700.63,4617.6 ; Load_PA1.1 v1(1700.63,4442.6) ; v1(1700.63,4572.6) 1700.63,4607.6 R1_PA1.1@1710.63,4617.6
  Bottom Layer w10: v1(1335.63,4597.6) 1415.63,4597.6 v1(1420.63,4592.6) ; v1(1700.63,4442.6) v1(1700.63,4572.6)
NetLoad_PA2_1: Load_PA2.1 R1_PA2.1 R2_PA2.2 U4_PA2.5 | length 953.2
  Top Layer w10: R2_PA2.2 2275,4595 v1(2270,4600) ; v1(2355,4595) U4_PA2.5 2383,4551.4 2383,4586.51 2381.56,4587.95 2381.56,4629.59 2397.18,4645.21 2609.79,4645.21 R1_PA2.1@2635,4620 ; Load_PA2.1 v1(2635,4445) ; v1(2635,4575) 2635,4610 R1_PA2.1@2645,4620
  Bottom Layer w10: v1(2270,4600) 2350,4600 v1(2355,4595) ; v1(2635,4445) v1(2635,4575)
NetLoad_PA3_1: Load_PA3.1 R1_PA3.1 R2_PA3.2 U4_PA3.5 | length 953.2
  Top Layer w10: R2_PA3.2 3205.63,4597.6 v1(3200.63,4602.6) ; v1(3285.63,4597.6) U4_PA3.5 3313.63,4554 3313.63,4589.11 3312.19,4590.55 3312.19,4632.19 3327.81,4647.81 3540.42,4647.81 R1_PA3.1@3565.63,4622.6 ; Load_PA3.1 v1(3565.63,4447.6) ; v1(3565.63,4577.6) 3565.63,4612.6 R1_PA3.1@3575.63,4622.6
  Bottom Layer w10: v1(3200.63,4602.6) 3280.63,4602.6 v1(3285.63,4597.6) ; v1(3565.63,4447.6) v1(3565.63,4577.6)
NetP3_1: P3.1 R1_PA1.2 U4_PA1.4 U4_PA1.16 | length 842.2
  Top Layer w10: v1(1470,4595) 1470,4521.63 U4_PA1.4 1498.63,4493 1498.63,4473.44 1505.07,4467 1524.63,4467 1620.63,4371 U4_PA1.16 ; P3.1 1580,4715 1615,4680 v1(1660,4680) ; P3.1@1585.63,4747.6 1618.23,4715 1688.03,4715 R1_PA1.2@1704.11,4698.92
  Bottom Layer w10: v1(1470,4595) 1537.74,4595 1555.55,4612.81 1592.81,4612.81 v1(1660,4680)
NetP3_2: P3.2 U4_PA1.6 | length 274.2
  Top Layer w10: U4_PA1.6 1397.82,4548.19 1397.82,4602.05 1485.63,4689.86 P3.2@1485.63,4747.6
NetP3_3: P3.3 U4_PA1.7 | length 253.5
  Top Layer w10: U4_PA1.7 1348.63,4549 1348.63,4568.56 1381.82,4601.75 1381.82,4743.79 P3.3@1385.63,4747.6
NetP4_1: P4.1 R1_PA2.2 U4_PA2.4 U4_PA2.16 | length 844.7
  Top Layer w10: v1(2404.37,4597.4) 2404.37,4524.03 U4_PA2.4 2433,4495.4 2433,4475.85 2439.44,4469.4 2459,4469.4 2555,4373.4 U4_PA2.16 ; P4.1 2514.37,4717.4 2549.37,4682.4 v1(2594.37,4682.4) ; P4.1@2520,4750 2552.6,4717.4 2622.4,4717.4 R1_PA2.2@2638.48,4701.32
  Bottom Layer w10: v1(2404.37,4597.4) 2446.63,4597.4 2462.18,4612.95 2462.18,4617.18 2482.65,4637.65 2549.61,4637.65 v1(2594.37,4682.4)
NetP4_2: P4.2 U4_PA2.6 | length 274.2
  Top Layer w10: U4_PA2.6 2332.19,4550.59 2332.19,4604.45 2420,4692.26 P4.2@2420,4750
NetP4_3: P4.3 U4_PA2.7 | length 253.5
  Top Layer w10: U4_PA2.7 2283,4551.4 2283,4570.96 2316.19,4604.15 2316.19,4746.19 P4.3@2320,4750
NetP5_1: P5.1 R1_PA3.2 U4_PA3.4 U4_PA3.16 | length 852.3
  Top Layer w10: v1(3335,4600) 3335,4526.63 U4_PA3.4 3363.63,4498 3363.63,4478.44 3370.07,4472 3389.63,4472 3485.63,4376 U4_PA3.16 ; P5.1@3445,4770 3445,4720 3480,4685 v1(3525,4685) ; P5.1@3450.63,4752.6 3483.23,4720 3553.03,4720 R1_PA3.2@3569.11,4703.92
  Bottom Layer w10: v1(3335,4600) 3377.26,4600 3395.07,4617.81 3395.07,4635.07 3407.81,4647.81 3487.81,4647.81 v1(3525,4685)
NetP5_2: P5.2 U4_PA3.6 | length 274.2
  Top Layer w10: U4_PA3.6 3262.82,4553.19 3262.82,4607.05 3350.63,4694.86 P5.2@3350.63,4752.6
NetP5_3: P5.3 U4_PA3.7 | length 253.5
  Top Layer w10: U4_PA3.7 3213.63,4554 3213.63,4573.56 3246.82,4606.75 3246.82,4748.79 P5.3@3250.63,4752.6
NetR1_1: R1.1 R2.2 U1.1 | length 525.9
  Top Layer w10: U1.1 1852.17,3677.83 R2.2 1770,3579.61 R1.1
NetR4_1: R4.1 U2.94 | length 389.4
  Top Layer w10: v1(2320,2775) 2320,2684.09 2346.32,2657.76 2346.32,2619.67 U2.94@2384.42,2619.67
  Bottom Layer w10: v1(2320,2775) 2320.2,2775.2 R4.1
NetR5_1: R5.1 SW1.1 U2.14 | length 1058.8
  Top Layer w10: U2.14 2712.46,2434.98 2712.46,2399.8 2716.15,2396.11 2716.15,2394.6 2730,2380.75 2730,2375 2709.43,2354.43 2701.81,2354.43 2697.37,2350 2677.26,2350 2642.26,2315 v1(2580,2315) 2562.19,2297.19 2535.55,2297.19 2527.74,2305 2450,2305 R5.1 2405,2340 2405,2156.1 2482.52,2078.58 SW1.1@2797.48,2078.58
NetR6_PA1_2: R6_PA1.2 U4_PA1.10 | length 332.2
  Top Layer w10: v1(1320.63,4267.6) U4_PA1.10 ; v1(1400,4255) 1400,4259.34 1400.63,4259.97 1430.6,4230 1563.23,4230
  Bottom Layer w10: v1(1320.63,4267.6) 1333.23,4255 v1(1400,4255)
NetR6_PA2_2: R6_PA2.2 U4_PA2.10 | length 332.2
  Top Layer w10: v1(2255,4270) U4_PA2.10 ; v1(2334.37,4257.4) 2334.37,4261.74 2335,4262.37 2364.97,4232.4 2497.6,4232.4
  Bottom Layer w10: v1(2255,4270) 2267.6,4257.4 v1(2334.37,4257.4)
NetR6_PA3_2: R6_PA3.2 U4_PA3.10 | length 332.2
  Top Layer w10: v1(3185.63,4272.6) U4_PA3.10 ; v1(3265,4260) 3265,4264.34 3265.63,4264.97 3295.6,4235 3428.23,4235
  Bottom Layer w10: v1(3185.63,4272.6) 3198.23,4260 v1(3265,4260)
NetRg_PA1_1: Rg_PA1.1 U4_PA1.8 | length 99.6
  Top Layer w10: Rg_PA1.1 1255.13,4521 U4_PA1.8
NetRg_PA1_2: Rg_PA1.2 U4_PA1.9 | length 101.3
  Top Layer w10: Rg_PA1.2 1259.13,4335 U4_PA1.9
NetRg_PA2_1: Rg_PA2.1 U4_PA2.8 | length 99.6
  Top Layer w10: Rg_PA2.1 2189.5,4523.4 U4_PA2.8
NetRg_PA2_2: Rg_PA2.2 U4_PA2.9 | length 101.3
  Top Layer w10: Rg_PA2.2 2193.5,4337.4 U4_PA2.9
NetRg_PA3_1: Rg_PA3.1 U4_PA3.8 | length 99.6
  Top Layer w10: Rg_PA3.1 3120.13,4526 U4_PA3.8
NetRg_PA3_2: Rg_PA3.2 U4_PA3.9 | length 101.3
  Top Layer w10: Rg_PA3.2 3124.13,4340 U4_PA3.9
NetU2_12: U2.12 Y1.3 | length 388.9
  Top Layer w10: v1(2615,2290) 2615.51,2289.49 Y1.3 ; v1(2670,2375) 2669.41,2375.59 2669.41,2436.85 U2.12@2670,2437.44 ; v1(2695,2295) 2695,2325 2708.43,2338.43 2723.43,2338.43 2730,2345 v1(2730,2335)
  Bottom Layer w10: v1(2615,2290) 2630,2305 2640,2295 v1(2695,2295) ; v1(2670,2375) 2670,2340 2725,2340 v1(2730,2335)
NetU2_13: U2.13 Y1.1 | length 268.7
  Top Layer w10: U2.13 2692.78,2434.98 2692.78,2385.71 v1(2699.62,2378.87) ; Y1.1 2752.19,2277.19 2752.19,2309.45 2752.81,2310.07 v1@2752.81,2356.44
  Bottom Layer w10: v1(2699.62,2378.87) 2696.13,2378.87 2715.55,2359.45 v1(2751.3,2359.45)
SWCLK: P7.4 U2.76 | length 778.5
  Top Layer w10: P7.4 1850,3130 v1(1900,3080) ; v1(1960,3075) 2063.78,2971.22 U2.76
  Bottom Layer w10: v1(1900,3080) 1905,3075 v1(1960,3075)
SWDIO: P7.2 U2.72 | length 1394.1
  Top Layer w10: P7.2 1477.19,3127.19 1477.19,2987.81 v1(1490,2975) ; v1(2145,3135) 2176.81,3103.19 2298.58,3103.19 2306.77,3095 v1(2415,3095) ; v1(2510,3125) 2512.83,3122.17 U2.72
  Bottom Layer w10: v1(1490,2975) 2025,2975 2145,3095 v1(2145,3135) ; v1(2415,3095) 2452.74,3095 2480.55,3122.81 2507.81,3122.81 v1(2510,3125)
"V+ 12V": C1.1 C21_PA1.1 C21_PA2.1 C21_PA3.1 P1.2 U1.3 U4_PA1.1 U4_PA1.2 U4_PA2.1 U4_PA2.2 U4_PA3.1 U4_PA3.2 | length 4459.3
  Top Layer w10: P1.2 1224.02,3677.83 U1.3 ; v1(1450.43,3744.57) U1.3 ; v1(1509.8,3730) 1457.64,3677.83 U1.3 ; U4_PA1.2 U4_PA1.1 1638.09,4538.46 C21_PA1.1 2128.46,4538.46 v1(2130,4540) ; C1.1 2004.61,3419.8 v1(2004.41,3420) ; v1(2525,4610) 2525,4543.4 U4_PA2.2 U4_PA2.1 2572.46,4540.87 C21_PA2.1 3069.13,4540.87 v1(3070,4540) ; v1(3460,4605) 3460,4550.37 U4_PA3.2 U4_PA3.1 3503.09,4543.46 C21_PA3.1
  Bottom Layer w10: v1(1450.43,3744.57) 1820,4114.13 v1(1820,4525) ; v1(1509.8,3730) 1694.41,3730 v1(2004.41,3420) ; v1(2130,4540) 2414.71,4540 2489.92,4615.21 2508.82,4615.21 2514.03,4610 v1(2525,4610) ; v1(3070,4540) 3342.74,4540 3420.55,4617.81 3439.45,4617.81 3452.81,4604.45 3459.45,4604.45 v1(3460,4605)
VOUT_3.3V: C2.1 C6.1 C7.1 C8.1 C9.1 C10.1 C11.1 C12.1 C13.1 C14.1 C15.1 C16.1 C17.1 C18.1 D1_PA1.K D1_PA2.K D1_PA3.K FB1.2 P2.1 P7.1 R1.2 R5.2 R7.2 U1.4 U2.6 U2.11 U2.19 U2.28 U2.50 U2.75 U2.100 | length 8165.9
  Top Layer w10: P2.1@1185.59,3454.41 P2.1@1190,3458.82 ; D1_PA1.K 1317.63,4135.93 1333.56,4120 ; U1.4@1515.59,3454.41 U1.4 U1.4@1630,3340 ; C2.1 C2.1@1855,3408.94 ; FB1.2@1855,3315 FB1.2 ; C18.1 2290,2490 v1(2305,2475) ; v1(2315,2415) 2330.32,2399.68 2330.32,2349.87 R5.2 ; v1(2355,2475) 2378.78,2498.78 U2.100 2395,2496.54 v1(2395,2470) ; U2.75 2455.19,3030.83 2455.19,2894.81 v1(2465,2885) ; v1(2535,2380) 2547.37,2380 2552.2,2384.83 U2.6 ; v1(2640,2370) 2640,2377.26 2650.63,2387.89 U2.11 ; v1(2792.63,2382.63) 2808.11,2398.11 U2.19 ; v1(2980,3030) 2987.24,3022.76 U2.50 ; U2.28 2990.02,2540.93 3030.73,2540.93 3033.68,2543.87 3033.68,2558.68 v1(3045,2570) ; D1_PA3.K@3173.36,4138.33 D1_PA3.K
  Top Layer w30: P2.1@1185.59,3454.41 U1.4@1515.59,3454.41 ; P2.1@1190,3458.82 v1(1190,3545) ; v1(1225,3830) 1317.63,3922.63 D1_PA1.K@1317.63,4135.93 ; 1333.56,4120 1562.74,4120 1565.55,4122.81 2066.04,4122.81 2068.85,4120 2233.67,4120 2242,4128.33 2606.56,4128.33 2614.89,4120 2625.11,4120 2643.44,4138.33 D1_PA3.K@3173.36,4138.33 ; P7.1 1380,3269.61 U1.4 ; R7.2 1704.17,3340 ; U1.4@1630,3340 1704.17,3340 ; FB1.2@1855,3315 2092.81,3077.19 2287.81,3077.19 2300,3065 v1(2345,3065) ; C2.1@1855,3408.94 FB1.2 R1.2 1704.17,3340 ; v1(2715,2880) 2795,2880 v1(2825,2850)
  Bottom Layer w10: v1@1185,3545 v1(1190,3545) ; v1(2305,2475) v1(2355,2475) ; v1(2315,2415) 2340,2415 v1(2395,2470) 2410,2470 2430.46,2490.46 2516.76,2490.46 2523.2,2496.9 2523.2,2530 C10.1 ; C15.1 2429.57,2920.43 v1(2465,2885) ; v1(2535,2380) 2535,2504.57 C10.1 ; C13.1 2560,2699.13 C7.1 2560.43,2614.57 C10.1 ; C10.1@2561.3,2529.13 C10.1 ; v1(2640,2370) 2640,2522.87 2645.63,2528.5 C11.1 ; C12.1@2755,2920 C12.1 ; C16.1@2765.87,2535 C16.1 2760,2410 2787.37,2382.63 v1(2792.63,2382.63) ; C6.1 C6.1@2829.57,2699.57 ; C14.1 C14.1@2825,2800.87 ; C9.1 2869.11,2495.46 2927.63,2495.46 2934.07,2501.9 2934.07,2504.33 3004.75,2575 3040,2575 v1(3045,2570)
  Bottom Layer w30: v1@1185,3545 1240,3600 1240,3815 v1(1225,3830) ; v1(2345,3065) 2375,3065 2400,3040 v1(2436.87,3040) 2555.43,3040 2670.43,2925 C12.1 2755,2975 2810,3030 v1(2980,3030) ; C10.1@2561.3,2529.13 C11.1 C16.1 ; v1(2715,2880) C12.1@2755,2920 ; C16.1@2765.87,2535 C9.1 C8.1 C6.1@2829.57,2699.57 ; C6.1 C14.1 ; C14.1@2825,2800.87 v1(2825,2850)
pads on no net: D1_PA1.NC D1_PA2.NC D1_PA3.NC U2.1 U2.2 U2.3 U2.4 U2.5 U2.7 U2.8 U2.9 U2.16 U2.17 U2.18 U2.24 U2.26 U2.29 U2.30 U2.31 U2.32 U2.33 U2.34 U2.35 U2.36 U2.37 U2.38 U2.39 U2.40 U2.41 U2.42 U2.43 U2.44 U2.45 U2.46 U2.47 U2.51 U2.52 U2.53 U2.54 U2.55 U2.56 U2.57 U2.58 U2.59 U2.60 U2.61 U2.62 U2.63 U2.64 U2.65 U2.66 U2.67 U2.68 U2.69 U2.77 U2.78 U2.79 U2.80 U2.81 U2.82 U2.83 U2.84 U2.85 U2.86 U2.87 U2.88 U2.89 U2.90 U2.91 U2.92 U2.93 U2.95 U2.96 U2.97 U2.98 U3.5 U3.8 U4_PA1.13 U4_PA1.14 U4_PA1.15 U4_PA2.13 U4_PA2.14 U4_PA2.15 U4_PA3.13 U4_PA3.14 U4_PA3.15

## Polygon pours and split planes (outlines as drawn)
no net on Bottom Layer "Bottom Layer-No Net" (solid, pour order 4): 3400,3135
DGND on Bottom Layer "Bottom Layer-DGND" (solid, pour order 2): 1000,5000 3900,5000 3900,1754 1000,1754

## Keep-outs
Keep-Out Layer:
  lines w10: 1000,1754 1000,5011 3903,5011 3903,1754 1000,1754

## Silkscreen, mask and mechanical layers (free items; w line width, h text height)
Top Overlay:
  text "Forse Sensor / Christine Yu / Alexei Garcia / April 2018" at 1390,1895 h60

## Text inside footprints (layer, text, board x,y; h text height)
U4_PA1: Top Overlay "*" at 1687.63,4531 h30 r270; Mechanical 13 "*" at 1687.63,4531 h30 r270
U4_PA2: Top Overlay "*" at 2622,4533.4 h30 r270; Mechanical 13 "*" at 2622,4533.4 h30 r270
U4_PA3: Top Overlay "*" at 3552.63,4536 h30 r270; Mechanical 13 "*" at 3552.63,4536 h30 r270